# EAGLE board Final project dld  (EAGLE 7.6.0)

Size 56.82 x 53.33 mm. Coordinates in mm from the lower left corner, seen from the top.
Outline: 0,0 56.82,0 56.82,53.33 0,53.33 0,0
Copper layers (1*16): Top 0.035mm / dielectric 1.5mm / Bottom 0.035mm
Design rules "default": minimum track width 10mil, minimum drill 24mil, track to track 8mil, track to pad 8mil, pad to pad 8mil, via to via 8mil, smd to smd 8mil, copper to edge 40mil, drill to drill 8mil, minimum pad ring 10mil, minimum via ring 8mil, stop-mask expansion 4mil, vias tented up to drill 0mil, thermal gap 10mil

## Footprints (pad centres in the part's own frame; a part is rotated, then mirrored left to right if it is on the bottom)
CR2032H = drill 1.118 pad 2.54 octagon: + 5.08,10.795; +@1 -5.08,10.795; - 0,-6.985
HDSP-M = drill 0.813 long: 1 -5.08,-7.62; 2 -2.54,-7.62; 3 0,-7.62; 4 2.54,-7.62; 5 5.08,-7.62; 6 5.08,7.62; 7 2.54,7.62; 8 0,7.62; 9 -2.54,7.62; 10 -5.08,7.62
0207/10 = drill 0.813 octagon: 1 -5.08,0; 2 5.08,0

## Placement (x,y rotation side)
BAT2  [CR2032H]  5,10.08 0 top
Digit1  [HDSP-M]  5,22.78 0 top
R1  1k‎Ω  [0207/10]  5,35.48 0 top

## Library data of the parts
BAT2 Digit1 R1 = AUTODESK_CIRCUITS_BREADBOARD

## Nets
N$1: BAT2.- R1.2
N$2: Digit1.7
N$3: Digit1.1
N$4: Digit1.9
N$5: Digit1.10
N$6: Digit1.3
N$7: BAT2.+ BAT2.+@1 Digit1.8
N$8: Digit1.2
N$9: Digit1.4 Digit1.5 Digit1.6 R1.1

## Tracks (layer width: path | path; a pad name or v marks a point on that pad's centre or on a via)
N$1  (1 unrouted)
N$7  (2 unrouted)
N$9  (3 unrouted)